# EAGLE board rc2014_can_controller (EAGLE 7.6.0)
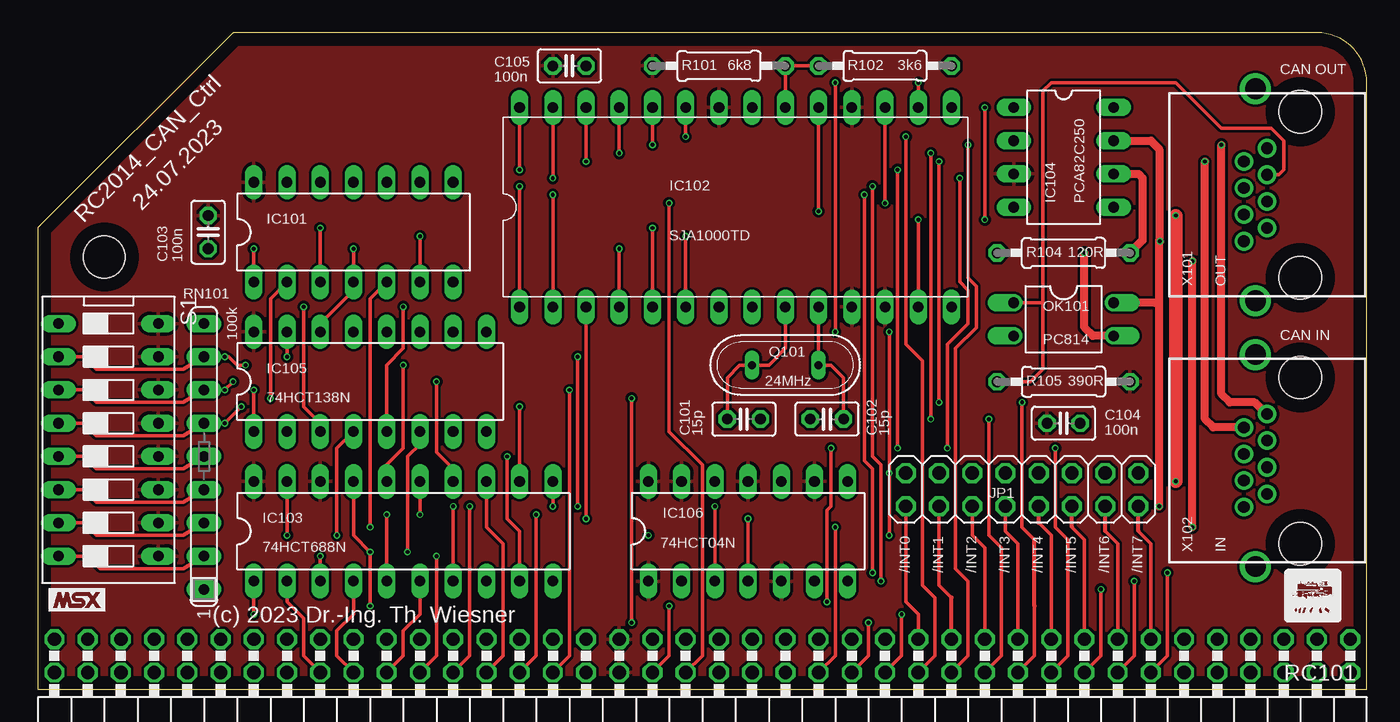
[diagram p0: board, top side]
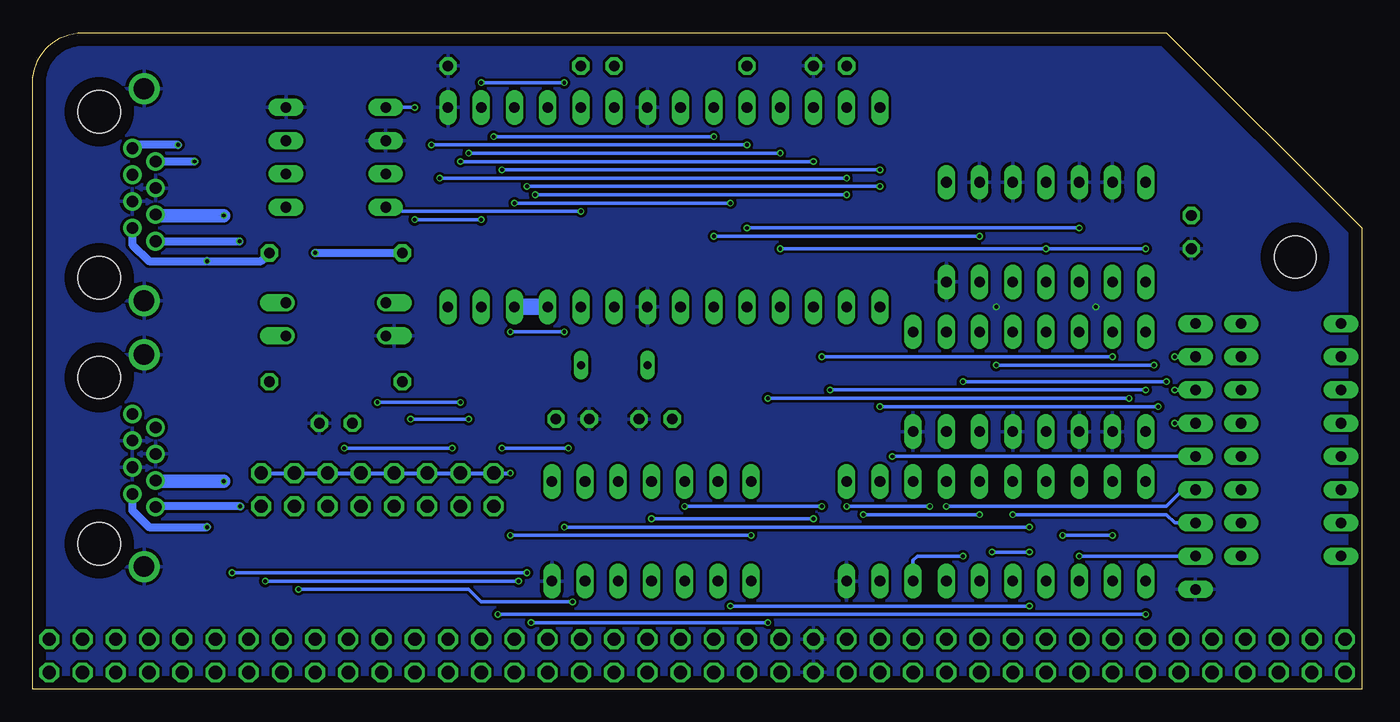
[diagram p1: board, bottom side, seen from below]

Size 101.6 x 50.16 mm. Coordinates in mm from the lower left corner, seen from the top.
Copper layers (1*16): Top 0.035mm / dielectric 1.5mm / Bottom 0.035mm
Design rules "default *": minimum track width 10mil, minimum drill 0.3mm, track to track 8mil, track to pad 4mil, pad to pad 8mil, via to via 8mil, smd to smd 8mil, copper to edge 40mil, drill to drill 8mil, minimum pad ring 10mil, minimum via ring 4mil, stop-mask expansion 4mil, vias tented up to drill 0mil, thermal gap 10mil

## Footprints (pad centres in the part's own frame; a part is rotated, then mirrored left to right if it is on the bottom)
C025-025X050 = drill 0.813 octagon: 1 -1.27,0; 2 1.27,0
DIL14 = drill 0.813 long: 1 -7.62,-3.81; 2 -5.08,-3.81; 3 -2.54,-3.81; 4 0,-3.81; 5 2.54,-3.81; 6 5.08,-3.81; 7 7.62,-3.81; 8 7.62,3.81; 9 5.08,3.81; 10 2.54,3.81; 11 0,3.81; 12 -2.54,3.81; 13 -5.08,3.81; 14 -7.62,3.81
DIL28 = drill 0.813 pad 1.27 long: 1 -16.51,-7.62; 2 -13.97,-7.62; 3 -11.43,-7.62; 4 -8.89,-7.62; 5 -6.35,-7.62; 6 -3.81,-7.62; 7 -1.27,-7.62; 8 1.27,-7.62; 9 3.81,-7.62; 10 6.35,-7.62; 11 8.89,-7.62; 12 11.43,-7.62; 13 13.97,-7.62; 14 16.51,-7.62; 15 16.51,7.62; 16 13.97,7.62; 17 11.43,7.62; 18 8.89,7.62; 19 6.35,7.62; 20 3.81,7.62; 21 1.27,7.62; 22 -1.27,7.62; 23 -3.81,7.62; 24 -6.35,7.62; 25 -8.89,7.62; 26 -11.43,7.62; 27 -13.97,7.62; 28 -16.51,7.62
DIL20 = drill 0.813 long: 1 -11.43,-3.81; 2 -8.89,-3.81; 3 -6.35,-3.81; 4 -3.81,-3.81; 5 -1.27,-3.81; 6 1.27,-3.81; 7 3.81,-3.81; 8 6.35,-3.81; 9 8.89,-3.81; 10 11.43,-3.81; 11 11.43,3.81; 12 8.89,3.81; 13 6.35,3.81; 14 3.81,3.81; 15 1.27,3.81; 16 -1.27,3.81; 17 -3.81,3.81; 18 -6.35,3.81; 19 -8.89,3.81; 20 -11.43,3.81
DIL08 = drill 0.813 long: 1 -3.81,-3.81; 2 -1.27,-3.81; 3 1.27,-3.81; 4 3.81,-3.81; 5 3.81,3.81; 6 1.27,3.81; 7 -1.27,3.81; 8 -3.81,3.81
DIL16 = drill 0.813 long: 1 -8.89,-3.81; 2 -6.35,-3.81; 3 -3.81,-3.81; 4 -1.27,-3.81; 5 1.27,-3.81; 6 3.81,-3.81; 7 6.35,-3.81; 8 8.89,-3.81; 9 8.89,3.81; 10 6.35,3.81; 11 3.81,3.81; 12 1.27,3.81; 13 -1.27,3.81; 14 -3.81,3.81; 15 -6.35,3.81; 16 -8.89,3.81
2X08 = drill 1.016 octagon: 1 -8.89,-1.27; 2 -8.89,1.27; 3 -6.35,-1.27; 4 -6.35,1.27; 5 -3.81,-1.27; 6 -3.81,1.27; 7 -1.27,-1.27; 8 -1.27,1.27; 9 1.27,-1.27; 10 1.27,1.27; 11 3.81,-1.27; 12 3.81,1.27; 13 6.35,-1.27; 14 6.35,1.27; 15 8.89,-1.27; 16 8.89,1.27
DIL04 = drill 0.813 offset: 1 -1.27,-3.81; 2 1.27,-3.81; 3 1.27,3.81; 4 -1.27,3.81
QS = drill 0.61 long: 1 -2.54,0; 2 2.54,0
0207/10 = drill 0.813 octagon: 1 -5.08,0; 2 5.08,0
RC2014-STECKER = drill 1.016 octagon: A1 -49.53,1.27; A2 -46.99,1.27; A3 -44.45,1.27; A4 -41.91,1.27; A5 -39.37,1.27; A6 -36.83,1.27; A7 -34.29,1.27; A8 -31.75,1.27; A9 -29.21,1.27; A10 -26.67,1.27; A11 -24.13,1.27; A12 -21.59,1.27; A13 -19.05,1.27; A14 -16.51,1.27; A15 -13.97,1.27; A16 -11.43,1.27; A17 -8.89,1.27; A18 -6.35,1.27; A19 -3.81,1.27; A20 -1.27,1.27; A21 1.27,1.27; A22 3.81,1.27; A23 6.35,1.27; A24 8.89,1.27; A25 11.43,1.27; A26 13.97,1.27; A27 16.51,1.27; A28 19.05,1.27; A29 21.59,1.27; A30 24.13,1.27; A31 26.67,1.27; A32 29.21,1.27; A33 31.75,1.27; A34 34.29,1.27; A35 36.83,1.27; A36 39.37,1.27; A37 41.91,1.27; A38 44.45,1.27; A39 46.99,1.27; A40 49.53,1.27; B1 -49.53,3.81; B2 -46.99,3.81; B3 -44.45,3.81; B4 -41.91,3.81; B5 -39.37,3.81; B6 -36.83,3.81; B7 -34.29,3.81; B8 -31.75,3.81; B9 -29.21,3.81; B10 -26.67,3.81; B11 -24.13,3.81; B12 -21.59,3.81; B13 -19.05,3.81; B14 -16.51,3.81; B15 -13.97,3.81; B16 -11.43,3.81; B17 -8.89,3.81; B18 -6.35,3.81; B19 -3.81,3.81; B20 -1.27,3.81; B21 1.27,3.81; B22 3.81,3.81; B23 6.35,3.81; B24 8.89,3.81; B25 11.43,3.81; B26 13.97,3.81; B27 16.51,3.81; B28 19.05,3.81; B29 21.59,3.81; B30 24.13,3.81; B31 26.67,3.81; B32 29.21,3.81; B33 31.75,3.81; B34 34.29,3.81; B35 36.83,3.81; B36 39.37,3.81; B37 41.91,3.81; B38 44.45,3.81; B39 46.99,3.81; B40 49.53,3.81 | hole 3.2: -45.72,33.02
SIL9 = drill 0.813 long: 1 -10.16,0; 2 -7.62,0; 3 -5.08,0; 4 -2.54,0; 5 0,0; 6 2.54,0; 7 5.08,0; 8 7.62,0; 9 10.16,0
DS-08 = drill 0.813 long: 1 -8.89,-3.81; 2 -6.35,-3.81; 3 -3.81,-3.81; 4 -1.27,-3.81; 5 1.27,-3.81; 6 3.81,-3.81; 7 6.35,-3.81; 8 8.89,-3.81; 9 8.89,3.81; 10 6.35,3.81; 11 3.81,3.81; 12 1.27,3.81; 13 -1.27,3.81; 14 -3.81,3.81; 15 -6.35,3.81; 16 -8.89,3.81
0446200002 = drill 0.889 pad 1.422: 1 3.556,2.54; 2 2.54,4.318; 3 1.524,2.54; 4 0.508,4.318; 5 -0.508,2.54; 6 -1.524,4.318; 7 -2.54,2.54; 8 -3.556,4.318 | drill 1.575 pad 2.286: S@1 -8.103,3.429; S@2 8.103,3.429 | hole 3.251: 6.35,0; -6.35,0

## Placement (x,y rotation side)
C101  15p  [C025-025X050]  53.98,20.64 0 top
C102  15p  [C025-025X050]  60.33,20.64 180 top
C103  100n  [C025-025X050]  13.02,34.92 90 top
C104  100n  [C025-025X050]  78.42,20.32 180 top
C105  100n  [C025-025X050]  40.64,47.62 180 top
IC101  74HCT32N  [DIL14]  24.13,34.92 0 top
IC102  SJA1000TD  [DIL28]  53.34,36.83 0 top
IC103  74HCT688N  [DIL20]  27.94,12.06 0 top
IC104  PCA82C250  [DIL08]  78.42,40.64 270 top
IC105  74HCT138N  [DIL16]  25.4,23.5 0 top
IC106  74HCT04N  [DIL14]  54.29,12.06 0 top
JP1  [2X08]  75.25,15.24 180 top
OK101  PC814  [DIL04]  78.42,28.26 270 top
Q101  24MHz  [QS]  57.15,24.77 180 top
R101  6k8  [0207/10]  52.07,47.62 0 top
R102  3k6  [0207/10]  64.77,47.62 180 top
R104  120R  [0207/10]  78.42,33.34 0 top
R105  390R  [0207/10]  78.42,23.5 180 top
RC101  RC2014-Steckverbinder  [RC2014-STECKER]  50.8,0 0 top
RN101  100k  [SIL9]  12.7,17.78 90 top
S1  [DS-08]  5.4,19.05 270 top
X101  OUT  [0446200002]  96.52,37.78 90 top
X102  IN  [0446200002]  96.52,17.46 90 top

## Library data of the parts
C101-C105 = rcl
IC101 IC103 IC105 IC106 = 74xx-eu
IC102 RC101 = mbc
IC104 = micro-philips; OC_FARNELL: 3692358; OC_NEWARK: unknown
JP1 = pinhead
OK101 = optocoupler; OC_FARNELL: 9707662; OC_NEWARK: unknown
Q101 = special
R101 R102 R104 R105 = resistor
RN101 = resistor-sil; OC_FARNELL: unknown; OC_NEWARK: unknown
S1 = switch-dil; MPN: DS08; OC_FARNELL: unknown; OC_NEWARK: 73J0071
X101 X102 = mbc; MF: MOLEX; MPN: 0446200002; OC_FARNELL: 9251910

## Nets
+5V: C103.2 C104.2 C105.2 IC101.14 IC102.11 IC102.12 IC102.18 IC102.22 IC103.18 IC103.20 IC104.3 IC105.16 IC106.1 IC106.5 IC106.9 IC106.11 IC106.13 IC106.14 R101.1 R105.1 RC101.A18 RC101.B18 S1.9 S1.10 S1.11 S1.12 S1.13 S1.14 S1.15 S1.16
+18V: X101.6 X102.6
/ALE: IC105.15 IC106.3
/CS: IC101.1 IC101.4 IC102.4 IC105.14
/CSCAN: IC103.19 IC105.4
/INT0: JP1.16 RC101.B27
/INT1: JP1.14 RC101.B28
/INT2: JP1.12 RC101.B29
/INT3: JP1.10 RC101.B30
/INT4: JP1.8 RC101.B31
/INT5: JP1.6 RC101.B32
/INT6: JP1.4 RC101.B33
/INT7: JP1.2 RC101.B34
/INTCAN: IC102.16 JP1.1 JP1.3 JP1.5 JP1.7 JP1.9 JP1.11 JP1.13 JP1.15
/IORQ: IC103.1 RC101.A26
/M1: IC103.17 IC105.6 RC101.A19
/RD: IC101.2 RC101.A25
/RD#: IC101.3 IC102.5
/RESET: IC102.17 RC101.A20
/WR: IC101.5 RC101.A24
/WR#: IC101.6 IC102.6
A0: IC105.1 RC101.A16
A1: IC103.15 RC101.A15
A2: IC103.13 RC101.A14
A3: IC103.11 RC101.A13
A4: IC103.8 RC101.A12
A5: IC103.6 RC101.A11
A6: IC103.4 RC101.A10
A7: IC103.2 RC101.A9
ALE: IC102.3 IC106.4
CAN-H: IC104.7 OK101.4 X101.8 X102.8
CAN-L: IC104.6 R104.2 X101.7 X102.7
D0: IC102.23 RC101.A27
D1: IC102.24 RC101.A28
D2: IC102.25 RC101.A29
D3: IC102.26 RC101.A30
D4: IC102.27 RC101.A31
D5: IC102.28 RC101.A32
D6: IC102.1 RC101.A33
D7: IC102.2 RC101.A34
GND: C101.2 C102.2 C103.1 C104.1 C105.1 IC101.7 IC101.9 IC101.10 IC101.12 IC101.13 IC102.8 IC102.15 IC102.21 IC103.10 IC104.2 IC104.8 IC105.2 IC105.3 IC105.5 IC105.8 IC106.7 OK101.2 R102.1 RC101.A17 RC101.B17 RN101.1 X101.4 X101.5 X101.S@1 X101.S@2 X102.3 X102.4 X102.5 X102.S@1 X102.S@2
N$1: OK101.1 R105.2 X101.3
N$2: C101.1 IC102.9 Q101.2
N$3: OK101.3 R104.1
N$4: C102.1 IC102.10 Q101.1
N$6: IC103.16 RN101.8 S1.2
N$7: IC103.14 RN101.7 S1.3
N$8: IC103.12 RN101.6 S1.4
N$9: IC103.9 RN101.5 S1.5
N$10: IC103.7 RN101.4 S1.6
N$11: IC103.5 RN101.3 S1.7
N$12: X101.2 X102.2
N$13: X101.1 X102.1
N$16: IC103.3 RN101.2 S1.8
N$39: IC102.20 R101.2 R102.2
RX: IC102.19 IC104.4
TX: IC102.13 IC104.1

## Tracks (layer width: path | path; a pad name or v marks a point on that pad's centre or on a via)
+5V
  Bottom 1.27: IC102.11 IC102.12
  pour Top: 14.92,50.16 97.79,50.16 arc-90 101.6,46.35 101.6,0 0,0 0,35.24
+18V  (via drill 0.3)
  Top 1.016: v87,15.88 v87,36.2
  Bottom 0.61: X102.6 92.14,15.94 92.08,15.88 | 92.14,36.2 X101.6
  Bottom 1.016: 92.08,15.88 v87,15.88 | v87,36.2 92.14,36.2
/ALE  (via drill 0.3)
  Top 0.254: IC106.3 v51.75,13.97 | v41.27,13.97 v41.27,25.4 | v19.05,25.4 IC105.15
  Bottom 0.254: v51.75,13.97 v41.27,13.97 | v41.27,25.4 v19.05,25.4
/CS  (via drill 0.3)
  Top 0.254: IC102.4 v44.45,33.66 | v16.51,33.66 IC101.1 | v24.13,33.66 IC101.4 24.13,30.48 21.59,27.94 IC105.14
  Bottom 0.254: v44.45,33.66 v24.13,33.66 v16.51,33.66
/CSCAN  (via drill 0.3)
  Top 0.254: IC103.19 v19.05,11.75 | IC105.4 22.86,18.41 v22.86,11.75
  Bottom 0.254: v22.86,11.75 v19.05,11.75
/INT0
  Top 0.254: RC101.B27 67.31,5.71 66.36,6.67 JP1.16
/INT1
  Top 0.254: 69.85,6.99 68.9,7.94 JP1.14
  Top 0.305: RC101.B28 69.85,6.99
/INT2
  Top 0.254: RC101.B29 72.39,10.79 71.44,11.75 JP1.12
/INT3
  Top 0.254: RC101.B30 74.93,11.11 73.98,12.06 JP1.10
/INT4
  Top 0.254: RC101.B31 77.47,11.75 76.52,12.7
  Top 0.305: 76.52,12.7 JP1.8
/INT5
  Top 0.254: RC101.B32 80.01,11.43 79.06,12.38
  Top 0.305: 79.06,12.38 JP1.6
/INT6
  Top 0.254: RC101.B33 82.55,11.11 81.6,12.06
  Top 0.305: 81.6,12.06 JP1.4
/INT7
  Top 0.254: RC101.B34 85.09,11.11 84.14,12.06
  Top 0.305: 84.14,12.06 JP1.2
/INTCAN  (via drill 0.3)
  Top 0.254: v65.09,11.75 v65.09,16.51 v65.09,27.3 | v60.96,27.3 v60.96,46.35 | v67.31,46.35 IC102.16
  Bottom 0.254: v46.67,11.75 v65.09,11.75 | v65.09,27.3 v60.96,27.3 | v60.96,46.35 v67.31,46.35
  Bottom 0.305: JP1.1 JP1.3 JP1.5 JP1.7 JP1.9 JP1.11 JP1.13 JP1.15 v65.09,16.51
/IORQ  (via drill 0.3)
  Top 0.254: IC103.1 v16.51,5.71 | v66.04,5.71 66.04,2.54 RC101.A26
  Bottom 0.254: v16.51,5.71 v66.04,5.71
/M1  (via drill 0.3)
  Top 0.254: RC101.A19 48.26,2.54 v48.26,6.35 | v25.4,6.35 v25.4,10.48 24.13,11.75 IC103.17 | IC105.6 29.21,18.73 28.26,17.78 v28.26,10.48
  Bottom 0.254: v48.26,6.35 v25.4,6.35 | v28.26,10.48 v25.4,10.48
/RD  (via drill 0.3)
  Top 0.254: v63.5,5.08 63.5,2.54 RC101.A25 | v45.4,5.08 v45.4,22.23 | v17.78,22.23 17.78,29.84 IC101.2
  Bottom 0.254: v45.4,5.08 v63.5,5.08 | v45.4,22.23 v17.78,22.23
/RD#  (via drill 0.3)
  Top 0.254: IC102.5 v46.99,35.24 | v21.59,35.24 IC101.3
  Bottom 0.254: v46.99,35.24 v21.59,35.24
/RESET  (via drill 0.3)
  Top 0.254: RC101.A20 50.8,2.54 50.8,17.14 48.26,19.68 v48.26,37.15 | v64.77,37.15 IC102.17
  Bottom 0.254: v48.26,37.15 v64.77,37.15
/WR  (via drill 0.3)
  Top 0.254: RC101.A24 60.96,2.54 v60.96,12.38 | v25.4,12.38 25.4,29.84 IC101.5
  Bottom 0.254: v60.96,12.38 v25.4,12.38
/WR#  (via drill 0.3)
  Top 0.254: IC102.6 v49.53,34.61 | v29.21,34.61 IC101.6
  Bottom 0.254: v49.53,34.61 v29.21,34.61
A0  (via drill 0.3)
  Top 0.254: RC101.A16 40.64,2.54 v40.64,22.86 | v16.51,22.86 IC105.1
  Bottom 0.254: v40.64,22.86 v16.51,22.86
A1  (via drill 0.3)
  Top 0.254: RC101.A15 38.1,2.54 v38.1,13.34 | v29.21,13.34 IC103.15
  Bottom 0.254: v38.1,13.34 v29.21,13.34
A2
  Top 0.254: RC101.A14 35.56,2.54 35.56,11.11 34.29,12.38 IC103.13
A3  (via drill 0.3)
  Top 0.254: RC101.A13 33.02,2.54 v33.02,13.97 | v39.37,13.97 IC103.11
  Bottom 0.254: v33.02,13.97 v39.37,13.97
A4  (via drill 0.3)
  Top 0.254: RC101.A12 30.48,2.54 v30.48,10.16
  Bottom 0.254: v30.48,10.16 33.97,10.16 34.29,9.84 IC103.8
A5
  Top 0.254: RC101.A11 27.94,2.54 27.94,4.45 29.21,5.71 IC103.6
A6
  Top 0.254: RC101.A10 22.86,2.54 22.86,4.45 24.13,5.71 IC103.4
A7
  Top 0.254: RC101.A9 20.32,2.54 20.32,5.4 19.05,6.67 IC103.2
ALE  (via drill 0.3)
  Top 0.254: IC106.4 v54.29,13.02 | v41.91,13.02 IC102.3
  Bottom 0.254: v54.29,13.02 v41.91,13.02
CAN-H  (via drill 0.3)
  Top 0.61: IC104.7 85.09,41.91 85.72,41.27 85.72,34.29 | OK101.4 85.41,29.53 arc90 85.72,29.84 | v85.79,34.23 85.72,34.29 | v85.72,13.97 85.72,29.84 | 85.72,29.84 85.72,34.29
  Bottom 0.61: X101.8 v85.79,34.23 | v85.72,13.97 92.2,13.97 X102.8
CAN-L  (via drill 0.3)
  Top 0.61: IC104.6 84.14,39.37 84.45,39.05 84.45,34.29 R104.2 | v88.27,12.38 v88.27,32.7
  Bottom 0.61: X101.7 93.98,33.97 92.71,32.7 v88.27,32.7 84.14,32.7 R104.2 | X102.7 93.98,13.65 92.71,12.38 v88.27,12.38
D0  (via drill 0.3)
  Top 0.254: RC101.A27 68.58,2.54 68.58,6.99 67.63,7.94 67.63,25.08 66.36,26.35 v66.36,42.23 | v49.53,42.23 IC102.23
  Bottom 0.254: v66.36,42.23 v49.53,42.23
D1  (via drill 0.3)
  Top 0.254: RC101.A28 71.12,2.54 71.12,8.26 70.17,9.21 70.17,26.04 71.75,27.62 71.75,30.8 71.12,31.43 v71.12,41.59 | v46.99,41.59 IC102.24
  Bottom 0.254: v71.12,41.59 v46.99,41.59
D2  (via drill 0.3)
  Top 0.254: RC101.A29 73.66,2.54 73.66,5.71 73.66,10.79 72.71,11.75 v72.71,20.64 | v68.26,20.64 v68.26,40.96 | v44.45,40.96 IC102.25
  Bottom 0.254: v68.26,40.96 v44.45,40.96 | v72.71,20.64 v68.26,20.64
D3  (via drill 0.3)
  Top 0.254: RC101.A30 76.2,2.54 76.2,6.35 | v41.91,40.32 IC102.26 | 76.2,11.43 75.25,12.38 v75.25,21.91 | v68.9,40.32 v68.9,21.91
  Top 0.305: 76.2,6.35 76.2,11.43
  Bottom 0.254: v68.9,40.32 v41.91,40.32 | v68.9,21.91 v75.25,21.91
D4  (via drill 0.3)
  Top 0.254: RC101.A31 78.74,2.54 78.74,11.43 77.79,12.38 v77.79,18.41 | v70.48,39.05 70.48,31.11 71.12,30.48 71.12,27.94 69.53,26.35 v69.53,18.41 | v39.37,39.05 IC102.27
  Bottom 0.254: v70.48,39.05 v39.37,39.05 | v77.79,18.41 v69.53,18.41
D5  (via drill 0.3)
  Top 0.254: RC101.A32 81.28,2.54 v81.28,7.62 | v60.33,6.67 60.33,13.65 60.64,13.97 v60.64,18.41 | v65.72,18.41 v65.72,39.69 | v36.83,39.69 IC102.28
  Bottom 0.254: v81.28,7.62 68.26,7.62 67.31,6.67 v60.33,6.67 | v60.64,18.41 v65.72,18.41 | v65.72,39.69 v36.83,39.69
D6  (via drill 0.3)
  Top 0.254: RC101.A33 83.82,2.54 v83.82,8.26 | v64.45,8.26 64.45,17.14 63.82,17.78 v63.82,38.42 | v36.83,38.42 IC102.1
  Bottom 0.254: v83.82,8.26 v64.45,8.26 | v63.82,38.42 v36.83,38.42
D7  (via drill 0.3)
  Top 0.254: RC101.A34 86.36,2.54 v86.36,8.89 | v63.82,8.89 63.82,16.83 63.18,17.46 v63.18,37.78 | v39.37,37.78 IC102.2
  Bottom 0.254: v86.36,8.89 v63.82,8.89 | v63.18,37.78 v39.37,37.78
GND  (via drill 0.3)
  Top 0.254: IC105.3 21.59,20.32 20.32,21.59 v20.32,29.21 | IC105.5 26.67,24.77 27.94,26.04 v27.94,29.21
  pour Bottom: 14.92,50.16 97.79,50.16 arc-90 101.6,46.35 101.6,0 0,0 0,35.24
N$1
  Top 0.254: R105.2 75.88,23.5 76.83,24.45 76.83,29.53 | 76.83,29.53 OK101.1 | X101.3 94.87,39.31 95.25,39.69 95.25,41.91 94.3,42.86 90.49,42.86 87,46.35 77.47,46.35 76.83,45.72 76.83,29.53
N$2
  Top 0.254: IC102.9 57.15,26.04 55.88,24.77 Q101.2 53.66,24.77 52.7,23.81 C101.1
N$3  (via drill 0.3)
  Top 0.61: OK101.3 80.64,26.99 80.01,27.62 v80.01,33.34
  Bottom 0.61: v80.01,33.34 R104.1
N$4
  Top 0.254: IC102.10 Q101.1 60.64,24.77 61.59,23.81 C102.1
N$6  (via drill 0.3)
  Top 0.254: RN101.8 11.11,24.45 4.45,24.45 3.49,25.4 S1.2 | IC103.16 26.67,17.14 27.94,18.41 v27.94,24.77 | v15.88,24.77 15.24,24.77 14.61,25.4 v14.29,25.4
  Bottom 0.254: v27.94,24.77 v15.88,24.77 | v14.29,25.4 RN101.8
N$7  (via drill 0.3)
  Top 0.254: RN101.7 11.11,21.91 4.45,21.91 3.49,22.86 S1.3 | IC103.14 31.75,16.83 30.48,18.1 v30.48,23.5 | v14.92,23.5 v14.29,22.86
  Bottom 0.254: v30.48,23.5 v14.92,23.5 | v14.29,22.86 RN101.7
N$8  (via drill 0.3)
  Top 0.254: RN101.6 11.11,19.37 4.45,19.37 3.49,20.32 S1.4 | v14.29,20.32 v15.56,21.59 | v36.83,21.59 IC103.12
  Bottom 0.254: RN101.6 v14.29,20.32 | v15.56,21.59 v36.83,21.59
N$9  (via drill 0.3)
  Top 0.254: RN101.5 11.11,16.83 4.45,16.83 3.49,17.78 S1.5 | v35.88,17.78 35.88,13.02 36.83,12.06 IC103.9
  Bottom 0.254: RN101.5 v35.88,17.78
N$10  (via drill 0.3)
  Top 0.254: RN101.4 11.11,14.29 4.45,14.29 3.49,15.24 S1.6 | IC103.7 v31.75,13.97
  Bottom 0.254: RN101.4 13.65,15.24 14.92,13.97 v31.75,13.97
N$11  (via drill 0.3)
  Top 0.254: RN101.3 11.11,11.75 4.45,11.75 3.49,12.7 S1.7 | v26.67,13.34 IC103.5
  Bottom 0.254: RN101.3 14.29,12.7 14.92,13.34 v26.67,13.34
N$12  (via drill 0.3)
  Top 0.61: X102.2 89.85,20 89.22,20.64 v89.22,40.32
  Bottom 0.61: v89.22,40.32 X101.2
N$13  (via drill 0.3)
  Top 0.61: X102.1 93.92,21.02 93.03,21.91 91.12,21.91 90.49,22.54 v90.49,41.59
  Bottom 0.61: v90.49,41.59 93.73,41.59 X101.1
N$16  (via drill 0.3)
  Top 0.254: RN101.2 11.11,9.21 4.76,9.21 3.81,10.16 S1.8 | v21.59,10.16 IC103.3
  Bottom 0.254: RN101.2 v21.59,10.16
N$39
  Top 0.254: R102.2 R101.2 IC102.20
RX  (via drill 0.3)
  Top 0.254: IC102.19 v59.69,36.51
  Bottom 0.254: v59.69,36.51 73.34,36.51 73.66,36.83 IC104.4
TX  (via drill 0.3)
  Top 0.254: v72.39,44.45 v72.39,35.88 | v67.31,35.88 IC102.13
  Bottom 0.254: IC104.1 v72.39,44.45 | v72.39,35.88 v67.31,35.88

## Text on the board
tNames: CAN OUT | 24.07.2023 | RC2014_CAN_Ctrl | CAN IN | /INT0 | /INT1 | /INT2 | /INT3 | /INT4 | /INT5 | /INT6 | /INT7 | (c) 2023 Dr.-Ing. Th. Wiesner